# EAGLE board object counter (EAGLE 6.1)
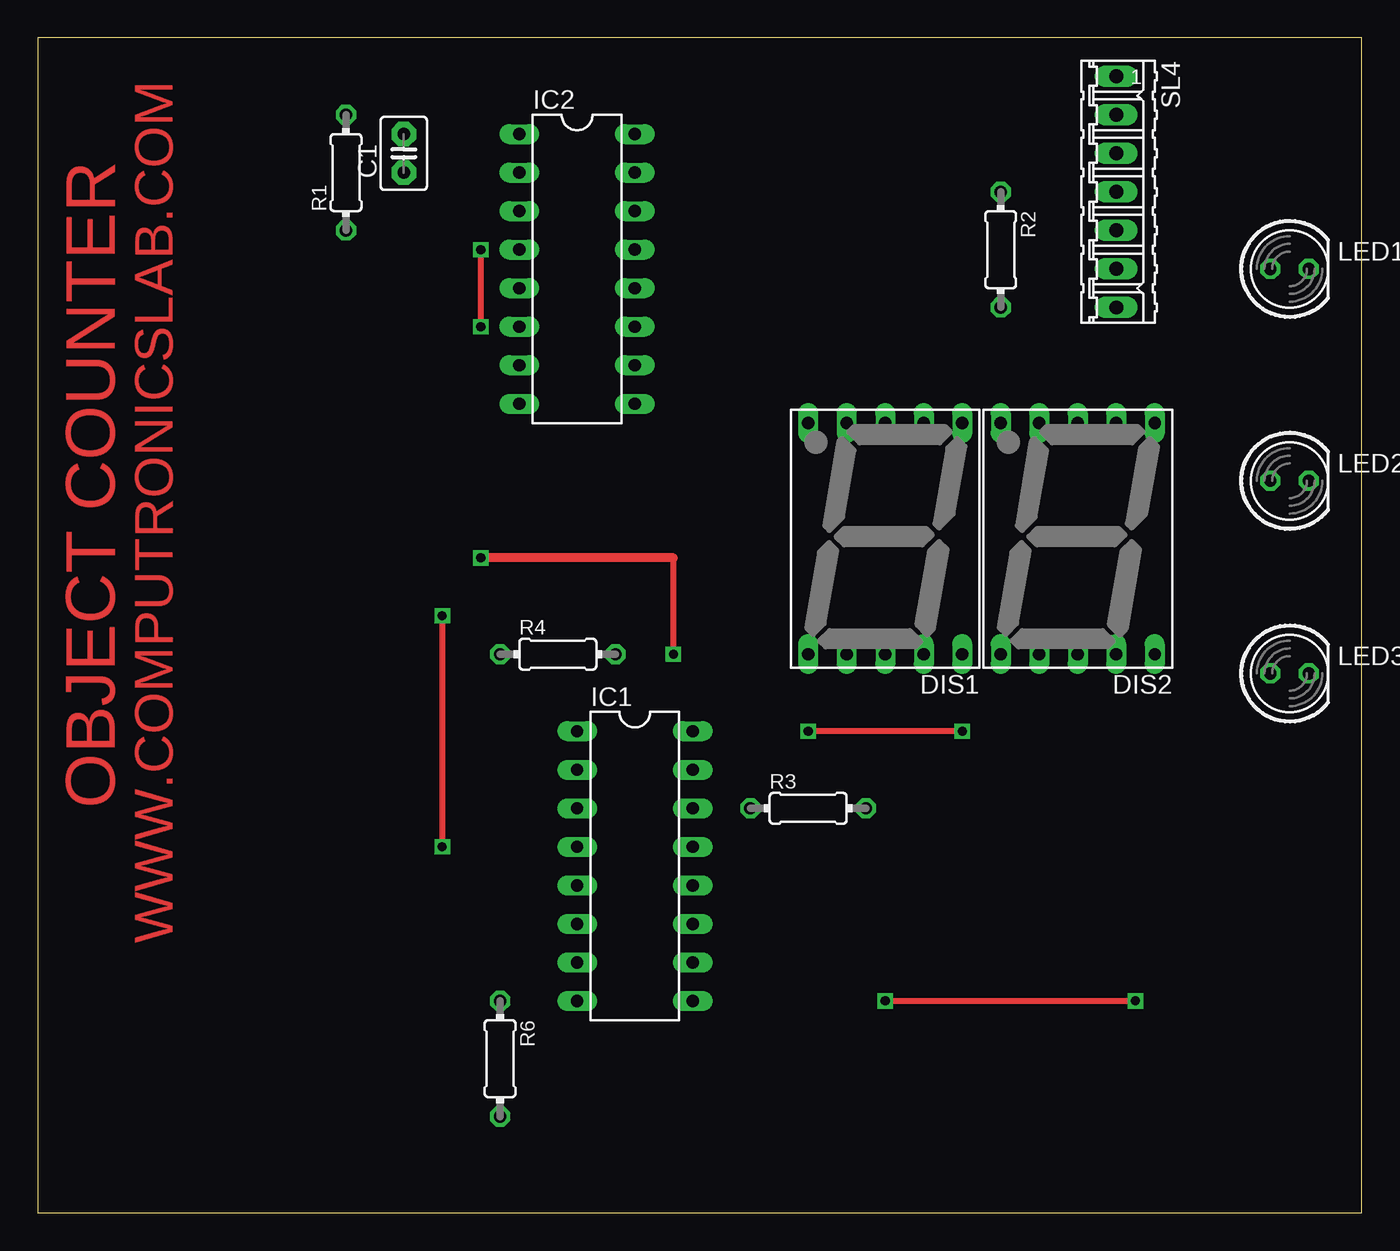
[diagram p0: board, top side]
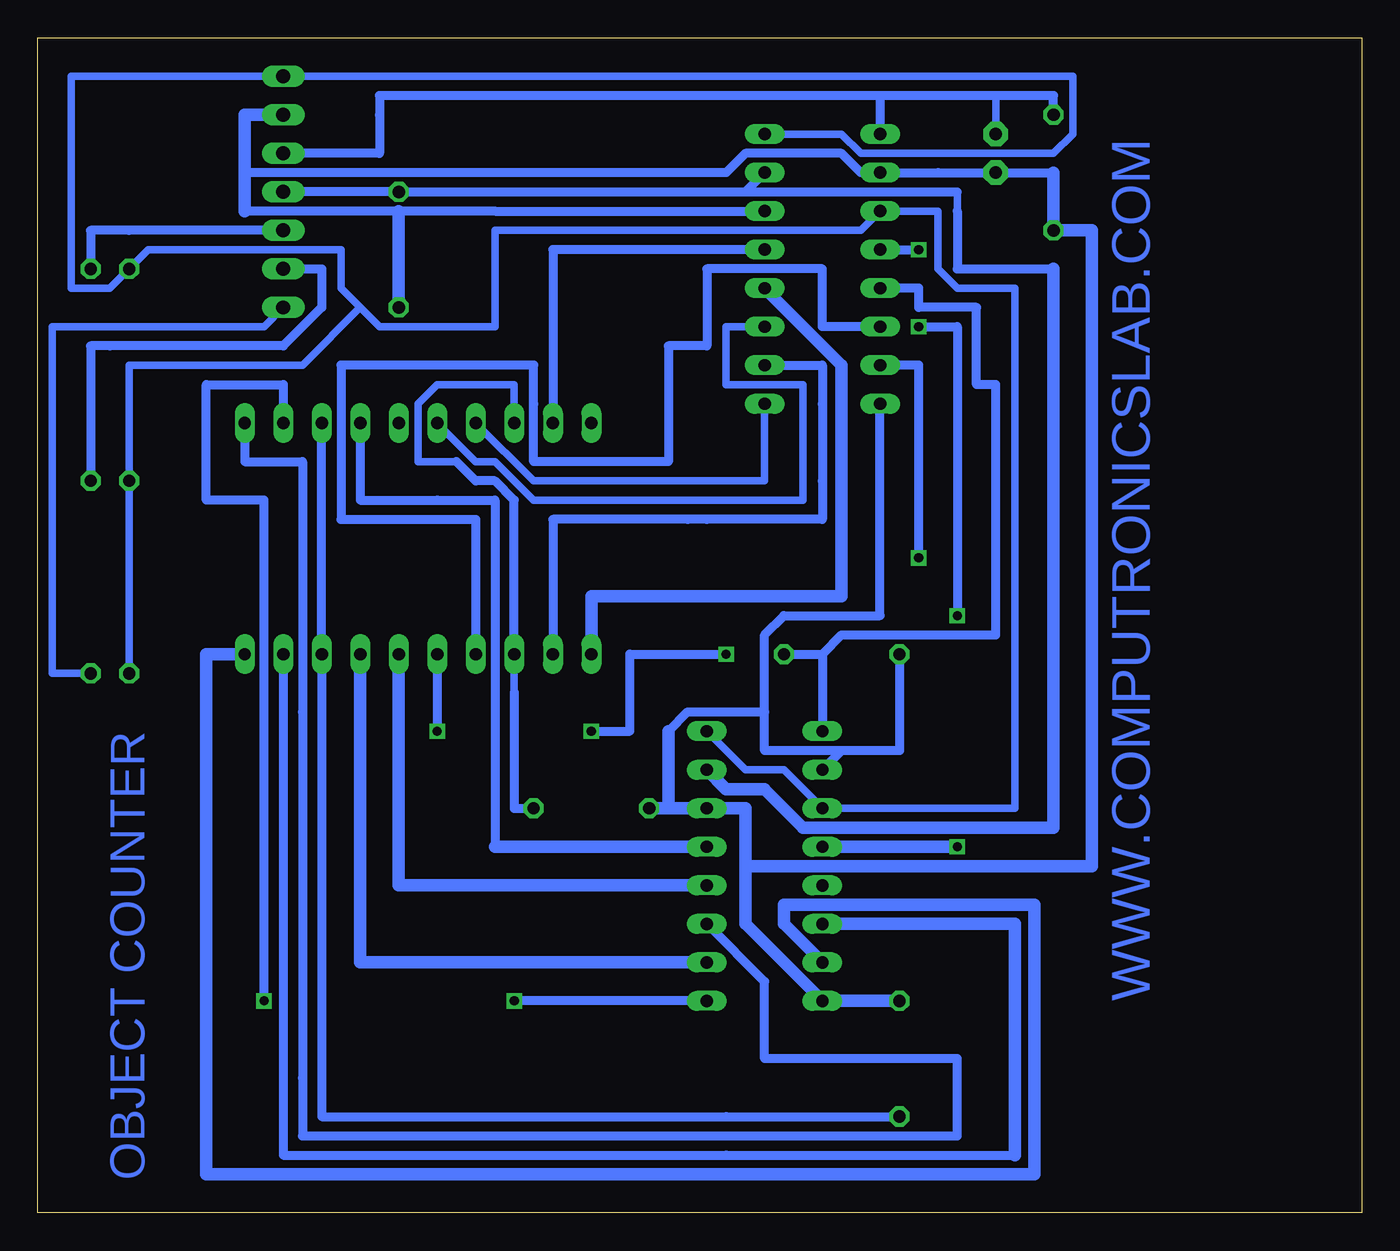
[diagram p1: board, bottom side, seen from below]

Size 87.3 x 77.46 mm. Coordinates in mm from the lower left corner, seen from the top.
Outline: 0,0 87.3,0 87.3,77.46 0,77.46 0,0
Copper layers (1*16): Top 0.035mm / dielectric 1.5mm / Bottom 0.035mm
Design rules: minimum track width 20mil, minimum drill 24mil, track to track 8mil, track to pad 8mil, pad to pad 8mil, via to via 8mil, smd to smd 8mil, copper to edge 40mil, drill to drill 8mil, minimum pad ring 10mil, minimum via ring 8mil, stop-mask expansion 4mil, vias tented up to drill 0mil, thermal gap 10mil

## Footprints (pad centres in the part's own frame; a part is rotated, then mirrored left to right if it is on the bottom)
C2.5-3 = drill 0.813 pad 1.6 octagon: 1 -1.27,0; 2 1.27,0
HDSP-M = drill 0.813 long: 1 -5.08,-7.62; 2 -2.54,-7.62; 3 0,-7.62; 4 2.54,-7.62; 5 5.08,-7.62; 6 5.08,7.62; 7 2.54,7.62; 8 0,7.62; 9 -2.54,7.62; 10 -5.08,7.62
DIL16 = drill 0.813 long: 1 -8.89,-3.81; 2 -6.35,-3.81; 3 -3.81,-3.81; 4 -1.27,-3.81; 5 1.27,-3.81; 6 3.81,-3.81; 7 6.35,-3.81; 8 8.89,-3.81; 9 8.89,3.81; 10 6.35,3.81; 11 3.81,3.81; 12 1.27,3.81; 13 -1.27,3.81; 14 -3.81,3.81; 15 -6.35,3.81; 16 -8.89,3.81
LED5MM = drill 0.813 octagon: A -1.27,0; K 1.27,0
0204/7 = drill 0.813 octagon: 1 -3.81,0; 2 3.81,0
07P = drill 0.914 long: 1 -7.62,0; 2 -5.08,0; 3 -2.54,0; 4 0,0; 5 2.54,0; 6 5.08,0; 7 7.62,0

## Placement (x,y rotation side)
C1  [C2.5-3]  24.13,69.85 90 top
DIS1  COMMON CATHODE  [HDSP-M]  55.88,44.45 180 top
DIS2  COMMON CATHODE  [HDSP-M]  68.58,44.45 180 top
IC1  4033  [DIL16]  39.37,22.86 270 top
IC2  4033  [DIL16]  35.56,62.23 270 top
LED1  [LED5MM]  82.55,62.23 0 top
LED2  [LED5MM]  82.55,48.26 0 top
LED3  [LED5MM]  82.55,35.56 0 top
R1  33K  [0204/7]  20.32,68.58 90 top
R2  47K  [0204/7]  63.5,63.5 270 top
R3  470E  [0204/7]  50.8,26.67 0 top
R4  33K  [0204/7]  34.29,36.83 0 top
R6  470E  [0204/7]  30.48,10.16 270 top
SL4  [07P]  71.12,67.31 270 top

## Library data of the parts
C1 = capacitor-wima
DIS1 DIS2 = display-hp; OC_FARNELL: unknown; OC_NEWARK: unknown
IC1 IC2 = maxim; MPN: MAX314EPE+; OC_FARNELL: unknown; OC_NEWARK: 99K3225
LED1-LED3 = led
R1-R4 R6 = eagle-ltspice; SPICEMODEL: NONE; SPICEPREFIX: R
SL4 = con-amp-quick; OC_FARNELL: unknown; OC_NEWARK: unknown

## Nets
GND: IC1.5
N$1: C1.1 IC1.2 IC1.8 IC1.14 IC2.2 IC2.8 IC2.14 R1.1 R2.2 R3.1 R4.1 R6.1 SL4.2
N$3: DIS1.3 DIS1.8 R3.2
N$4: C1.2 IC2.1 R1.2 SL4.3
N$5: DIS1.7 IC2.10
N$6: DIS1.6 IC2.12
N$7: DIS1.4 IC2.13
N$8: DIS1.2 IC2.9
N$9: DIS1.1 IC2.11
N$10: DIS1.9 IC2.6
N$11: DIS1.10 IC2.7
N$12: IC1.15 IC2.15 R2.1 SL4.4
N$13: IC1.3 IC1.16 IC2.3 IC2.16 LED1.A LED2.A LED3.A SL4.1
N$15: DIS2.3 DIS2.8 R6.2
N$16: IC1.1 IC2.5 R4.2
N$17: DIS2.7 IC1.10
N$18: DIS2.6 IC1.12
N$19: DIS2.4 IC1.13
N$20: DIS2.2 IC1.9
N$21: DIS2.1 IC1.11
N$22: DIS2.9 IC1.6
N$23: DIS2.10 IC1.7
N$24: LED1.K SL4.5
N$25: LED2.K SL4.6
N$26: LED3.K SL4.7
V-: IC1.4 IC2.4

## Tracks (layer width: path | path; a pad name or v marks a point on that pad's centre or on a via)
N$1
  Bottom 0.406: C1.1 27.94,68.58
  Bottom 0.508: 63.5,66.04 57.15,66.04
  Bottom 0.61: IC2.14 57.15,66.04 73.66,66.04 | 34.29,30.48 30.48,30.48 30.48,34.29 R4.1 | 34.29,30.48 IC1.2 | IC2.8 31.75,39.37 38.1,39.37 39.37,38.1 39.37,33.02 | 39.37,33.02 39.37,30.48 34.29,30.48 | 20.32,68.58 C1.1 27.94,68.58 IC2.2 33.02,68.58 34.29,69.85 40.64,69.85 41.91,68.58 73.66,68.58 | 39.37,33.02 44.45,33.02 45.72,31.75
  Bottom 0.813: R2.2 63.5,66.04 | SL4.2 73.66,72.39 73.66,69.85 73.66,68.58 73.66,66.04 | 20.32,68.58 R1.1 17.78,64.77 17.78,22.86 24.13,22.86 40.64,22.86 | R6.1 IC1.8 40.64,19.05 40.64,22.86 | R3.1 45.72,26.67 | 45.72,26.67 IC1.14 40.64,26.67 40.64,22.86 | 45.72,26.67 45.72,31.75
N$3
  Bottom 0.508: DIS1.8 55.88,34.29 | DIS1.3 55.88,54.61 58.42,54.61 60.96,54.61 62.23,53.34 62.23,49.53 59.69,49.53
  Bottom 0.61: 55.88,34.29 55.88,26.67 R3.2 | 59.69,49.53 58.42,48.26 57.15,48.26 55.88,46.99 DIS1.8
N$4
  Bottom 0.508: 24.13,73.66 C1.2
  Bottom 0.61: 31.75,73.66 31.75,72.39 IC2.1 | R1.2 20.32,73.66 24.13,73.66 31.75,73.66 | SL4.3 64.77,69.85 64.77,72.39 64.77,73.66 31.75,73.66
N$5
  Bottom 0.61: DIS1.7 53.34,45.72 44.45,45.72 43.18,45.72 35.56,45.72 35.56,48.26 35.56,53.34 35.56,55.88 IC2.10
N$6
  Bottom 0.813: IC2.12 34.29,55.88 34.29,40.64 46.99,40.64 50.8,40.64 DIS1.6
N$7
  Bottom 0.61: DIS1.4 53.34,63.5 IC2.13
N$8
  Bottom 0.508: IC2.9 39.37,49.53 39.37,48.26 44.45,48.26 54.61,48.26 DIS1.2
N$9
  Bottom 0.508: DIS1.1 58.42,49.53 57.15,49.53 54.61,46.99 43.18,46.99 36.83,46.99 36.83,48.26 36.83,53.34 36.83,54.61 40.64,54.61 41.91,54.61 41.91,55.88 41.91,58.42 IC2.11
N$10
  Bottom 0.61: DIS1.9 58.42,43.18 58.42,45.72 67.31,45.72 67.31,55.88 57.15,55.88 54.61,55.88 54.61,53.34 54.61,49.53 50.8,49.53 45.72,49.53 45.72,57.15 43.18,57.15 43.18,62.23 35.56,62.23 35.56,58.42 IC2.6
N$11  (via drill 0.6)
  Top 0.406: v60.96,31.75 v50.8,31.75 | v41.91,36.83 41.91,43.18
  Top 0.61: 41.91,43.18 v29.21,43.18
  Bottom 0.61: DIS1.10 v60.96,31.75 | v50.8,31.75 48.26,31.75 48.26,36.83 v41.91,36.83 | v29.21,43.18 29.21,55.88 IC2.7
N$12
  Bottom 0.508: 26.67,67.31 26.67,66.04 | 20.32,29.21 20.32,33.02 20.32,29.21
  Bottom 0.61: 40.64,67.31 IC2.15 | 40.64,67.31 R2.1 SL4.4 | 26.67,66.04 26.67,62.23 20.32,62.23 | 26.67,67.31 30.48,67.31 40.64,67.31
  Bottom 0.813: IC1.15 41.91,27.94 39.37,27.94 36.83,25.4 34.29,25.4 20.32,25.4 20.32,29.21 20.32,33.02 20.32,62.23
N$13
  Bottom 0.508: LED3.A LED2.A 81.28,55.88 69.85,55.88 66.04,59.69 | IC1.16 40.64,29.21 38.1,29.21 IC1.3 22.86,26.67 22.86,29.21 | 66.04,59.69 67.31,60.96 67.31,63.5 80.01,63.5 LED1.A 82.55,60.96 85.09,60.96 85.09,74.93 SL4.1 19.05,74.93 19.05,71.12 20.32,69.85 33.02,69.85 34.29,71.12 IC2.16 | 66.04,59.69 64.77,58.42 62.23,58.42 57.15,58.42 57.15,64.77 55.88,64.77 33.02,64.77 IC2.3 27.94,66.04 27.94,62.23 26.67,60.96 22.86,60.96 22.86,36.83 22.86,34.29 | 22.86,34.29 22.86,31.75 | 22.86,31.75 22.86,29.21 | 22.86,31.75 22.86,34.29 | 22.86,34.29 22.86,31.75 | 22.86,31.75 22.86,29.21 | 22.86,29.21 22.86,31.75
N$15
  Bottom 0.61: R6.2 41.91,6.35 68.58,6.35 68.58,12.7 68.58,33.02 DIS2.8 DIS2.3
N$16
  Bottom 0.508: 24.13,49.53 24.13,54.61 24.13,49.53
  Bottom 0.61: 35.56,36.83 IC1.1 | R4.2 35.56,36.83 | IC2.5 29.21,60.96 29.21,59.69 25.4,59.69 25.4,54.61 24.13,54.61 24.13,49.53 24.13,38.1 29.21,38.1 34.29,38.1 35.56,36.83
N$17
  Bottom 0.813: IC1.10 66.04,16.51 66.04,22.86 66.04,24.13 66.04,31.75 DIS2.7
N$18
  Bottom 0.508: 62.23,21.59 63.5,21.59 | 63.5,21.59 62.23,21.59 | 62.23,21.59 58.42,21.59 62.23,21.59 | 62.23,21.59 63.5,21.59 | 63.5,21.59 62.23,21.59
  Bottom 0.813: IC1.12 58.42,21.59 62.23,21.59 63.5,21.59 63.5,25.4 63.5,30.48 DIS2.6
N$19
  Bottom 0.61: 57.15,24.13 57.15,46.99 60.96,46.99 66.04,46.99 66.04,48.26 DIS2.4
  Bottom 0.813: IC1.13 44.45,24.13 57.15,24.13
N$20  (via drill 0.6)
  Top 0.406: v55.88,13.97 v72.39,13.97
  Bottom 0.61: IC1.9 v55.88,13.97 | v72.39,13.97 72.39,46.99 76.2,46.99 76.2,54.61 71.12,54.61 DIS2.2
N$21
  Bottom 0.61: IC1.11 39.37,15.24 39.37,10.16 29.21,10.16 26.67,10.16 26.67,7.62 26.67,5.08 41.91,5.08 69.85,5.08 69.85,8.89 69.85,33.02 69.85,49.53 73.66,49.53 DIS2.1
N$22
  Bottom 0.61: 22.86,3.81 41.91,3.81 71.12,3.81 71.12,13.97 71.12,33.02 DIS2.9
  Bottom 0.813: IC1.6 29.21,19.05 22.86,19.05 22.86,17.78 22.86,3.81
N$23
  Bottom 0.813: IC1.7 38.1,19.05 38.1,20.32 33.02,20.32 26.67,20.32 21.59,20.32 21.59,17.78 21.59,2.54 26.67,2.54 67.31,2.54 73.66,2.54 76.2,2.54 76.2,25.4 76.2,36.83 DIS2.10
N$24
  Bottom 0.61: LED1.K 83.82,64.77 81.28,64.77 SL4.5
N$25
  Bottom 0.61: LED2.K 83.82,57.15 82.55,57.15 71.12,57.15 68.58,59.69 68.58,62.23 SL4.6
N$26
  Bottom 0.508: LED3.K 85.09,35.56 86.36,35.56 86.36,43.18 86.36,58.42 | 83.82,58.42 86.36,58.42 | 86.36,58.42 83.82,58.42 | SL4.7 72.39,58.42 83.82,58.42 | 83.82,58.42 86.36,58.42
V-  (via drill 0.6)
  Top 0.406: v29.21,63.5 v29.21,58.42 | v26.67,39.37 v26.67,24.13
  Bottom 0.61: IC2.4 v29.21,63.5 | v29.21,58.42 26.67,58.42 v26.67,39.37
  Bottom 0.813: v26.67,24.13 IC1.4

## Text on the board
Top: OBJECT COUNTER | WWW.COMPUTRONICSLAB.COM
Bottom: OBJECT COUNTER | WWW.COMPUTRONICSLAB.COM